# Altium PCB IR_robottino_tracking2.PcbDoc
Units mm, origin at the board's own origin, x right, y up, seen from the top; angles counter-clockwise.
Board outline 18 x 10 mm, 4 copper layers (Top Layer, Internal Plane 1, Internal Plane 2, Bottom Layer); 7 components, 6 nets, 21 pads, 1 vias.
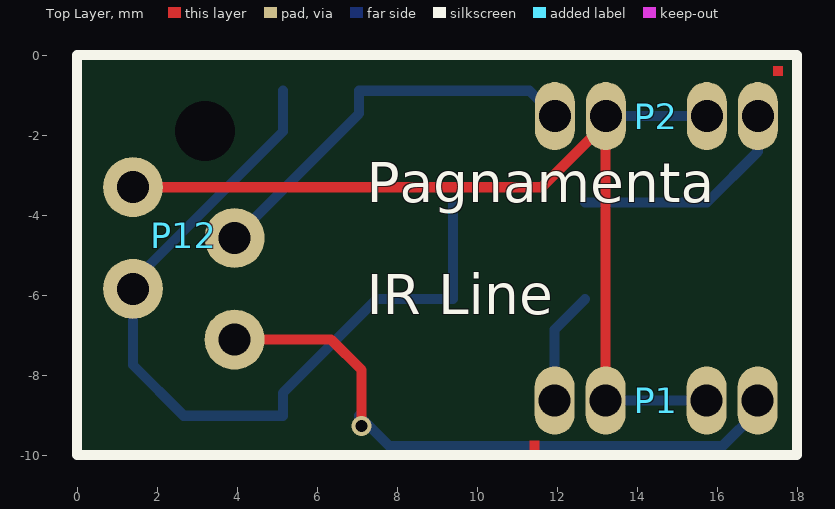
[diagram p0: Top Layer view]
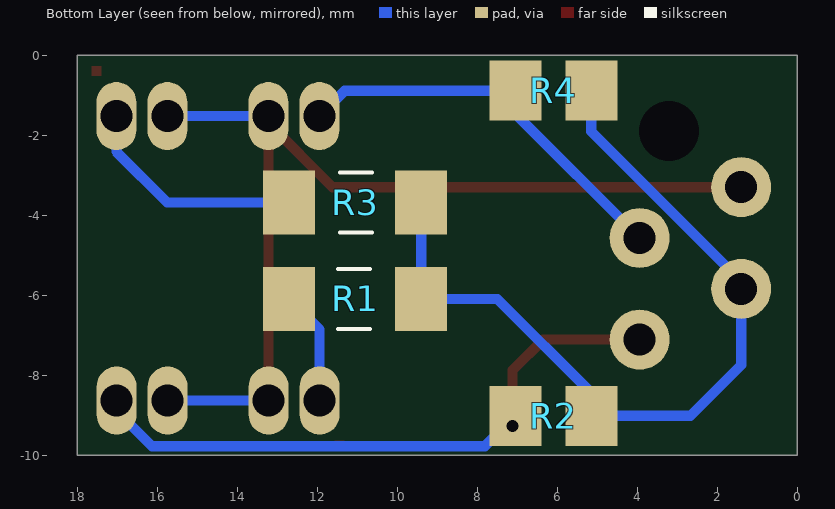
[diagram p1: Bottom Layer view, seen from below]
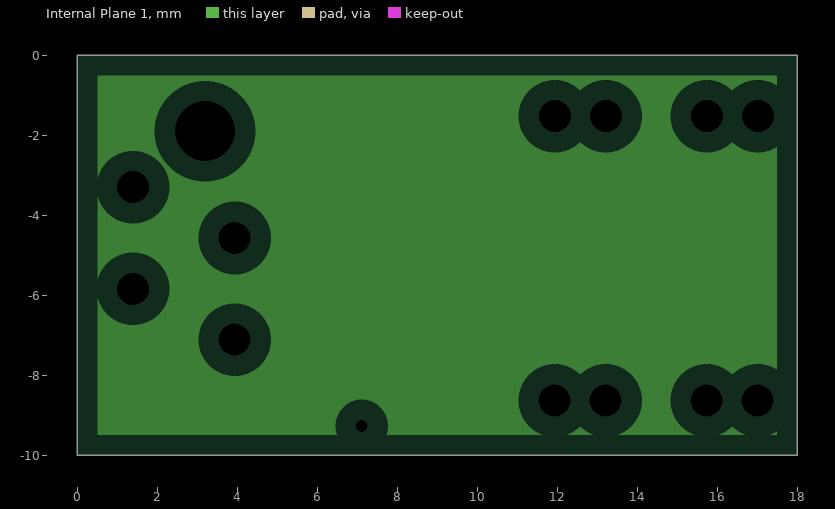
[diagram p2: Internal Plane 1, clearances drawn from the general rule]
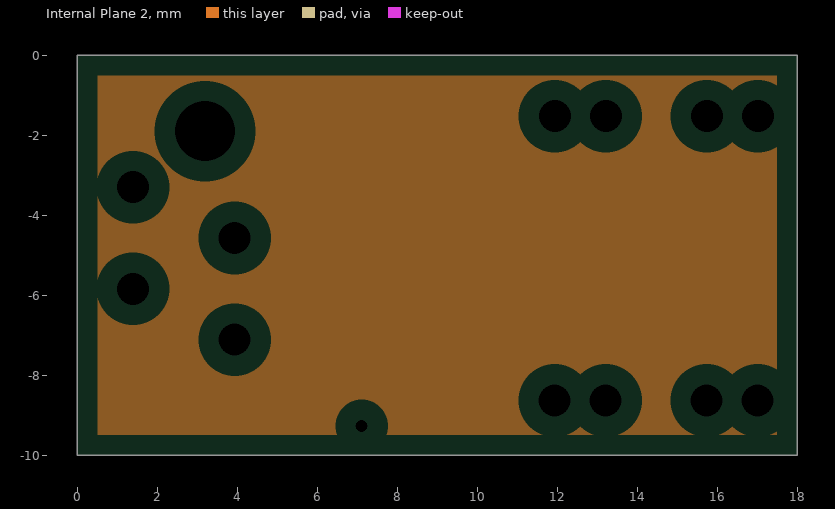
[diagram p3: Internal Plane 2, clearances drawn from the general rule]
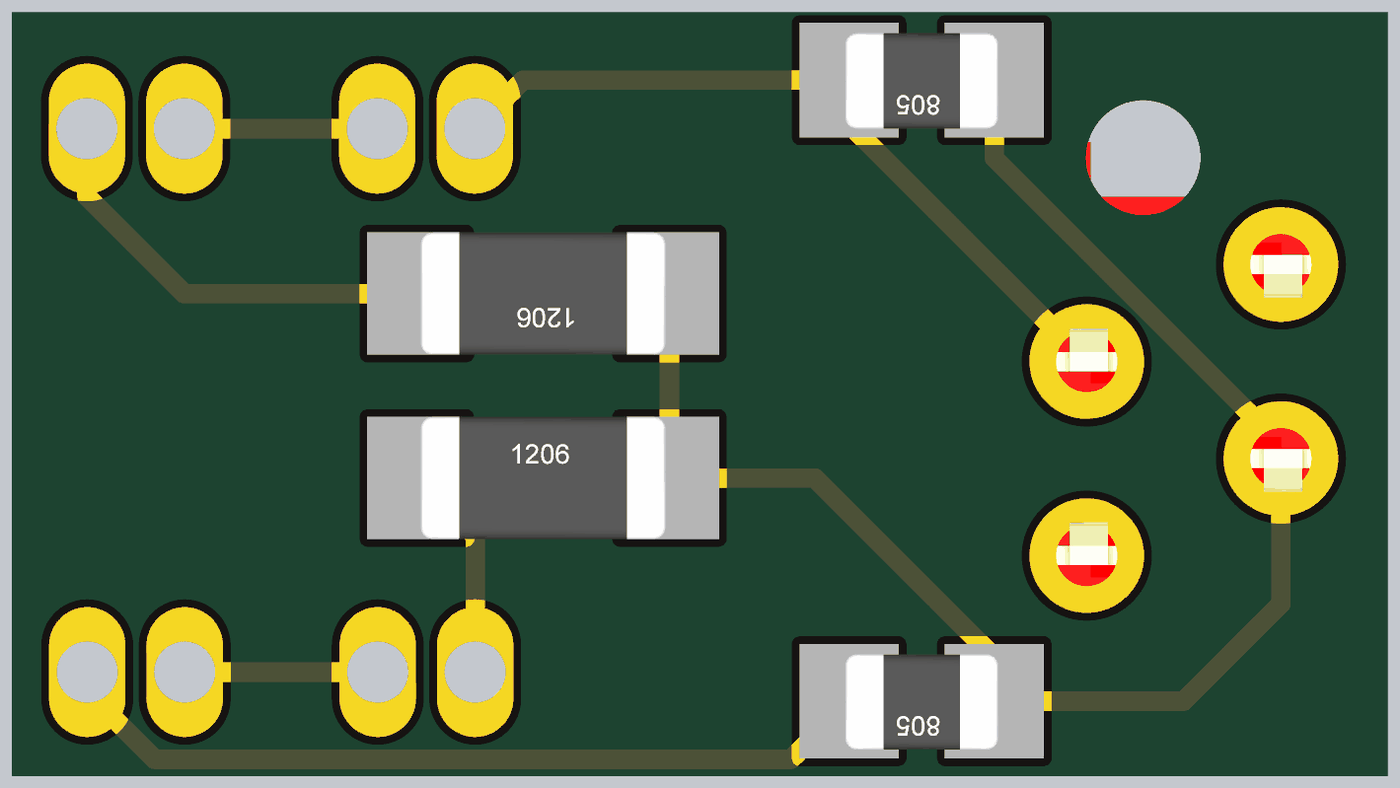
[diagram p4: 3D render of the assembled board from below, using the file's embedded part models]

## Layer stack, top to bottom
Top Layer: signal copper 0.0356
Dielectric: dielectric 0.32, FR-4, Dk 4.8
Internal Plane 1: plane copper 0.0356
Dielectric: dielectric 0.32, FR-4, Dk 4.8
Internal Plane 2: plane copper 0.0356
Dielectric: dielectric 0.32, FR-4, Dk 4.8
Bottom Layer: signal copper 0.0356

## Board outline
0,-10 18,-10 18,0 0,0

## Design rules (kind name [scope] priority, off if disabled: settings)
Clearance [All] p1: gap=0.15
PlaneClearance [All] p1: clearance=0.508
PlaneConnect [All] p1: planeconnectstyle=Direct reliefexpansion=0.508 reliefentries=4 reliefconductorwidth=0.254 reliefairgap=0.254
PolygonConnect PolygonConnect_nettie [InComponent('nt1') vs InNet('GND')] p1: connectstyle=Direct reliefconductorwidth=0.254 reliefentries=4 polygonreliefangle="90 Angle"
PolygonConnect PolygonConnect_pad [InComponent('U3') vs InNet('GND')] p2: connectstyle=Direct reliefconductorwidth=0.254 reliefentries=4 polygonreliefangle="90 Angle"
PolygonConnect [All] p3: connectstyle=Relief reliefconductorwidth=0.254 reliefentries=4 polygonreliefangle="90 Angle"
RoutingVias [All] p1: holewidth=0.35 width=0.6 viastyle="Through Hole" minholewidth=0.2 minwidth=0.4 maxholewidth=1.2 maxwidth=1
SilkscreenOverComponentPads [All] p1: minsilkscreentomaskgap=0.254
SolderMaskExpansion SolderMaskExpansion_via [IsVia] p1: expansion=-0.5
SolderMaskExpansion [All] p2: expansion=0.102
Width [All] p1: maxlimit=1 minlimit=0.203 preferedwidth=0.203
25 further rules are at their usual default settings.

## Components (designator, comment, footprint, x,y, rotation, side; value= is the part's Value field where it differs from the comment)
P1 "Header 2" "TCRT 1000" 11.938,-8.636 r0 top
P2 "Header 2" "TCRT 1000" 17.018,-1.524 r180 top
P12 "I2C" TYCO/215079-4 1.397,-3.302 r90 top
R1 "75ohm" R/1206 11.049,-6.096 r180 bottom
R2 "15kOhm" R/0805 6.096,-9.017 r0 bottom
R3 "75ohm" R/1206 11.049,-3.683 r0 bottom
R4 "15kOhm" R/0805 6.096,-0.889 r0 bottom

## Footprints (in the part's own frame and the unit in brackets; to place one, negate y for a bottom-side part, rotate by r counter-clockwise, add the part's x,y. Pads: shape width x height; smd on the part's side, far side on the other; paste and mask are expansions set on the pad)
R/0805 [mm] "Chip Resistor; Body 2.0 x 1.3 mm (LxW typ)"
  rect 1.3x1.5 smd: 1(-0.95,0) 2(0.95,0)
  body extent -1,-0.62 1,0.64, height 0.78
R/1206 [mm] "Chip Resistor, Body 3.2x1.6mm, IPC Low Density"
  rect 1.3x1.6 smd: 1(-1.651,0) 2(1.651,0)
  silkscreen extent -0.43,-0.75 0.38,0.75, body extent -1.6,-0.8 1.6,0.8, height 1
"TCRT 1000" [mm]
  oval 1x1.7 hole 0.8: 1(0,0) 2(1.275,0) 3(3.8,0) 4(5.075,0)
  Top Layer region: -0.625,-1.25 -0.375,-1.25 -0.375,-1 -0.625,-1
TYCO/215079-4 [mm]
  round 1.5 hole 0.8: 1(0,0) 2(-1.27,-2.54) 3(-2.54,0) 4(-3.81,-2.54)
  round 1.3 hole 1.5 unplated: 5(1.4,-1.8)
  body extent -5.41,-3.74 1.6,1.26, height 4

## Part data
P1 P2: library part "TCRT 1000", "Header, 2-Pin"
P12: library part Micromatch-I2C, "Micromatch I2C Connector"
R1 R2 R3 R4: library part R, "Resistor"

## Via types
v1: diameter 0.5, hole 0.3, Top Layer to Bottom Layer, 1 vias

## Nets (pads, with @x,y where several pads share a name; then routed paths per layer and width w, separated by ;. In a path a pad name is that pad's centre, name@x,y a point inside that pad or via, vN(x,y) a via of type N, cw(c..) or ccw(c..) an arc to the next point about the centre after c; other vN are vias at no path point)
DATA1: P1.4 P12.4 R2.2 | length 15.8
  Top Layer w0.254: P12.4 6.35,-7.112 7.112,-7.874 v1(7.112,-9.271)
  Bottom Layer w0.254: R2.2 7.808,-9.779 16.129,-9.779 17.013,-8.895 P1.4
DATA2: P2.4 P12.2 R4.2 | length 10.1
  Bottom Layer w0.254: P12.2 7.046,-1.463 R4.2 11.308,-0.889 P2.4
GND: P1.2 P1.3 P2.2 P2.3 P12.1 | length 24.6
  Top Layer w0.254: P12.1 11.614,-3.302 P2.3@13.213,-1.703 ; P1.2 P2.3@13.213,-1.703 ; P2.3 13.218,-1.698 P2.3@13.213,-1.703
  Bottom Layer w0.254: P1.2 P1.3 ; P2.3 P2.2
NetP1_1: P1.1 R1.1 | length 2.9
  Bottom Layer w0.254: P1.1 11.938,-6.858 R1.1
NetP2_1: P2.1 R3.2 | length 5.7
  Bottom Layer w0.254: R3.2 15.748,-3.683 17.018,-2.413 P2.1
VCC: P12.3 R1.2 R2.1 R3.1 R4.1 | length 20.9
  Bottom Layer w0.254: R4.1 5.146,-1.911 1.397,-5.66 P12.3 1.397,-7.747 2.667,-9.017 R2.1 5.146,-8.443 7.493,-6.096 R1.2 R3.1
pads on no net: P12.5

## Polygon pours and split planes (outlines as drawn)
no net on Internal Plane 1 (split plane): 17.49,-9.49 0.51,-9.49 0.51,-0.51 17.49,-0.51
no net on Internal Plane 2 (split plane): 17.49,-9.49 0.51,-9.49 0.51,-0.51 17.49,-0.51

## Silkscreen, mask and mechanical layers (free items; w line width, h text height)
Top Overlay:
  the board outline again, w0.254
  text "Pagnamenta" at 7.239,-3.683 h1
  text "IR Line" at 7.239,-6.477 h1